# Altium PCB PCB1.PcbDoc
Units mil, origin at the board's own origin, x right, y up, seen from the top; angles counter-clockwise.
Board outline 3915 x 3915 mil, 2 copper layers (Top Layer, Bottom Layer); 27 components, 23 nets, 78 pads, 8 vias.
Unrouted connection lines stored in the file: 7.
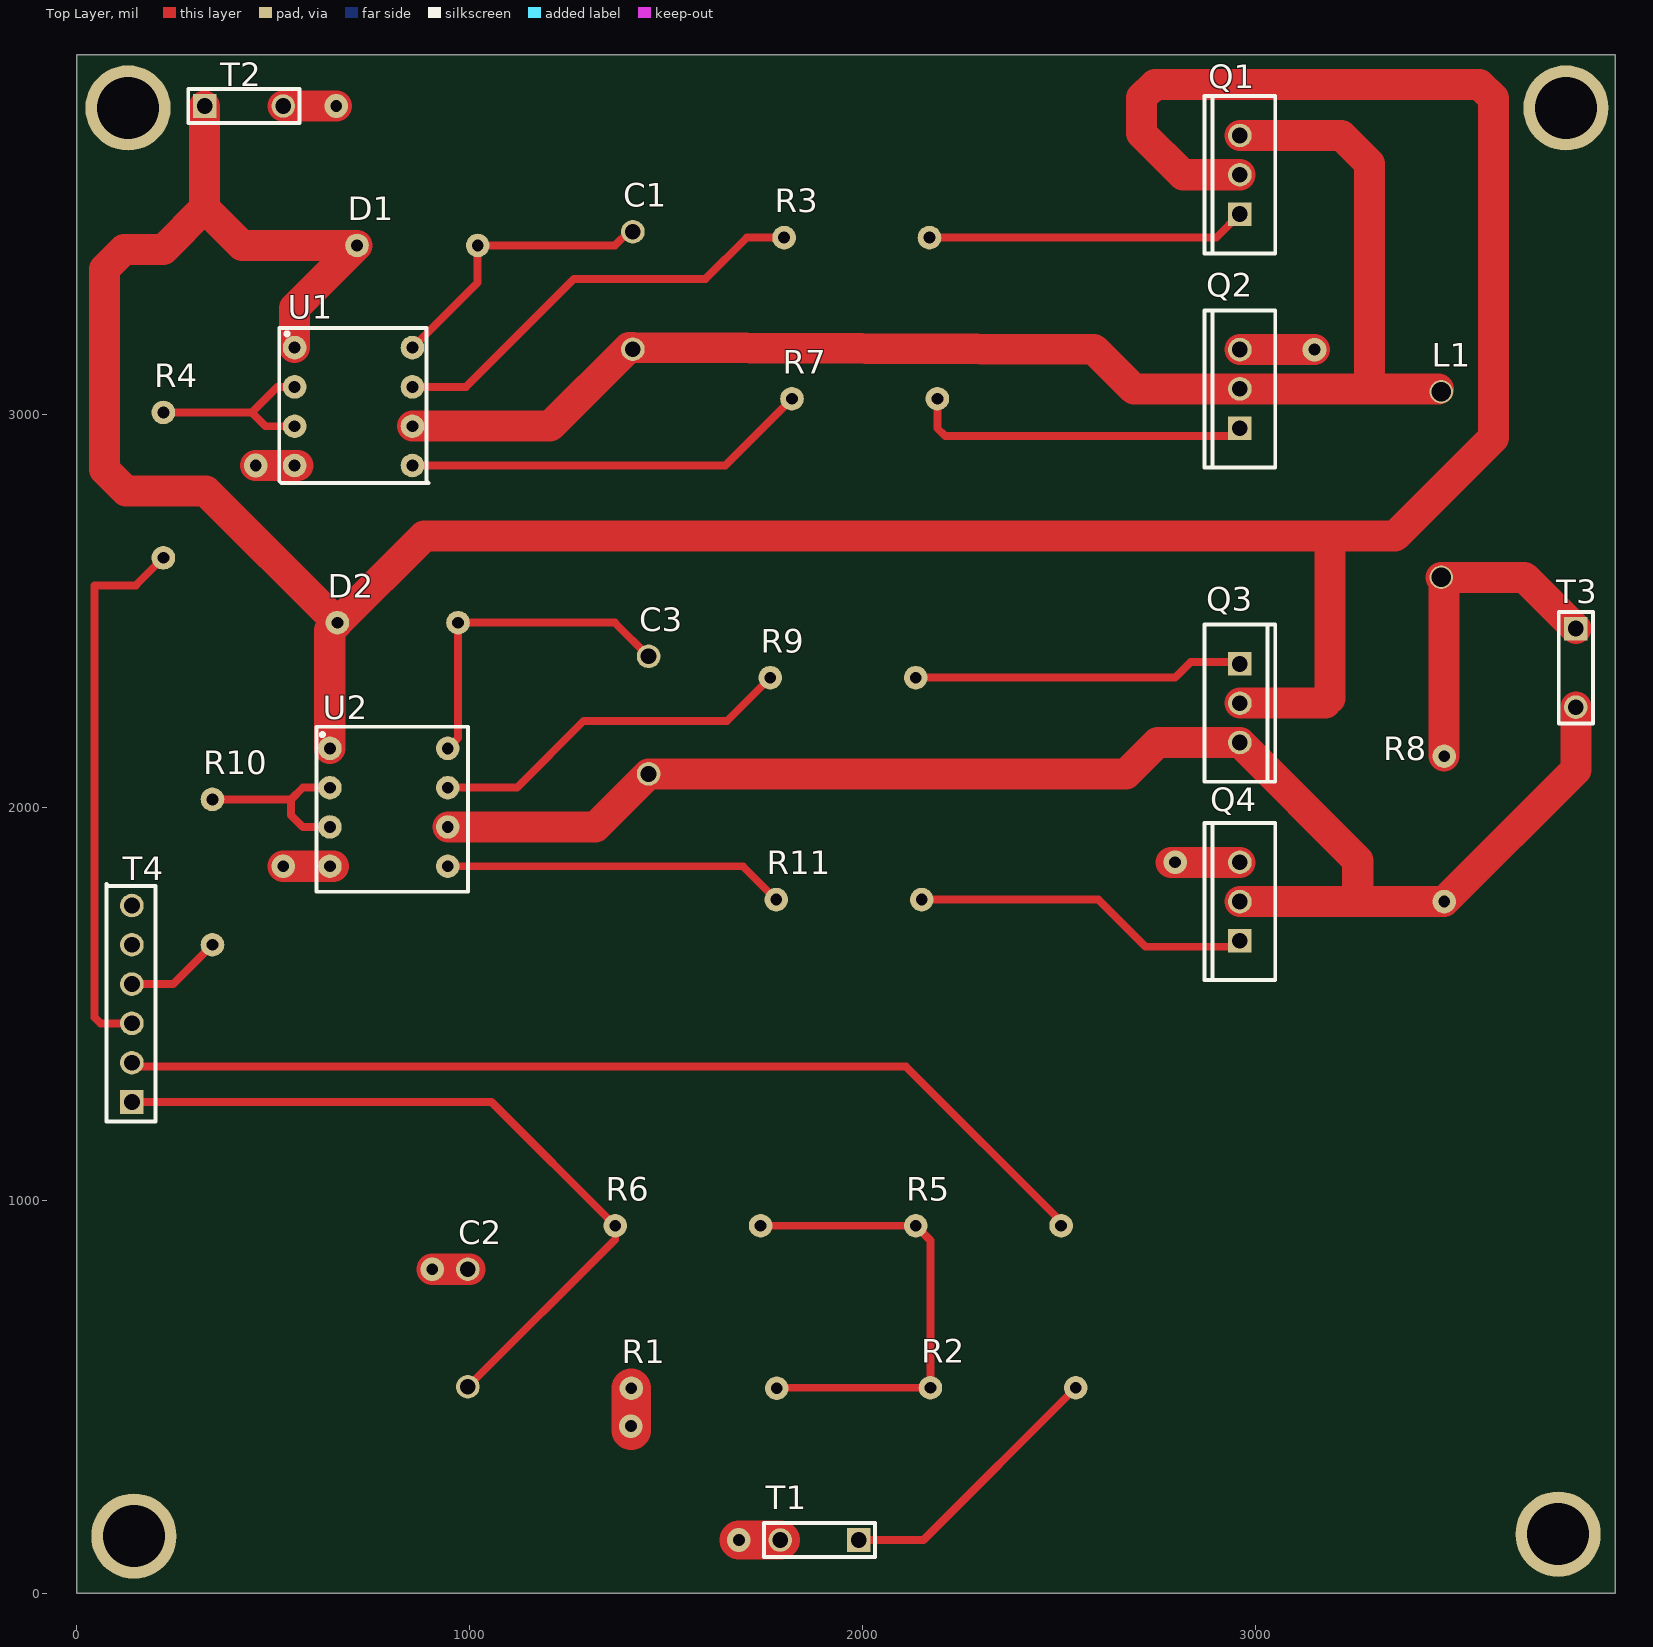
[diagram p0: Top Layer view]
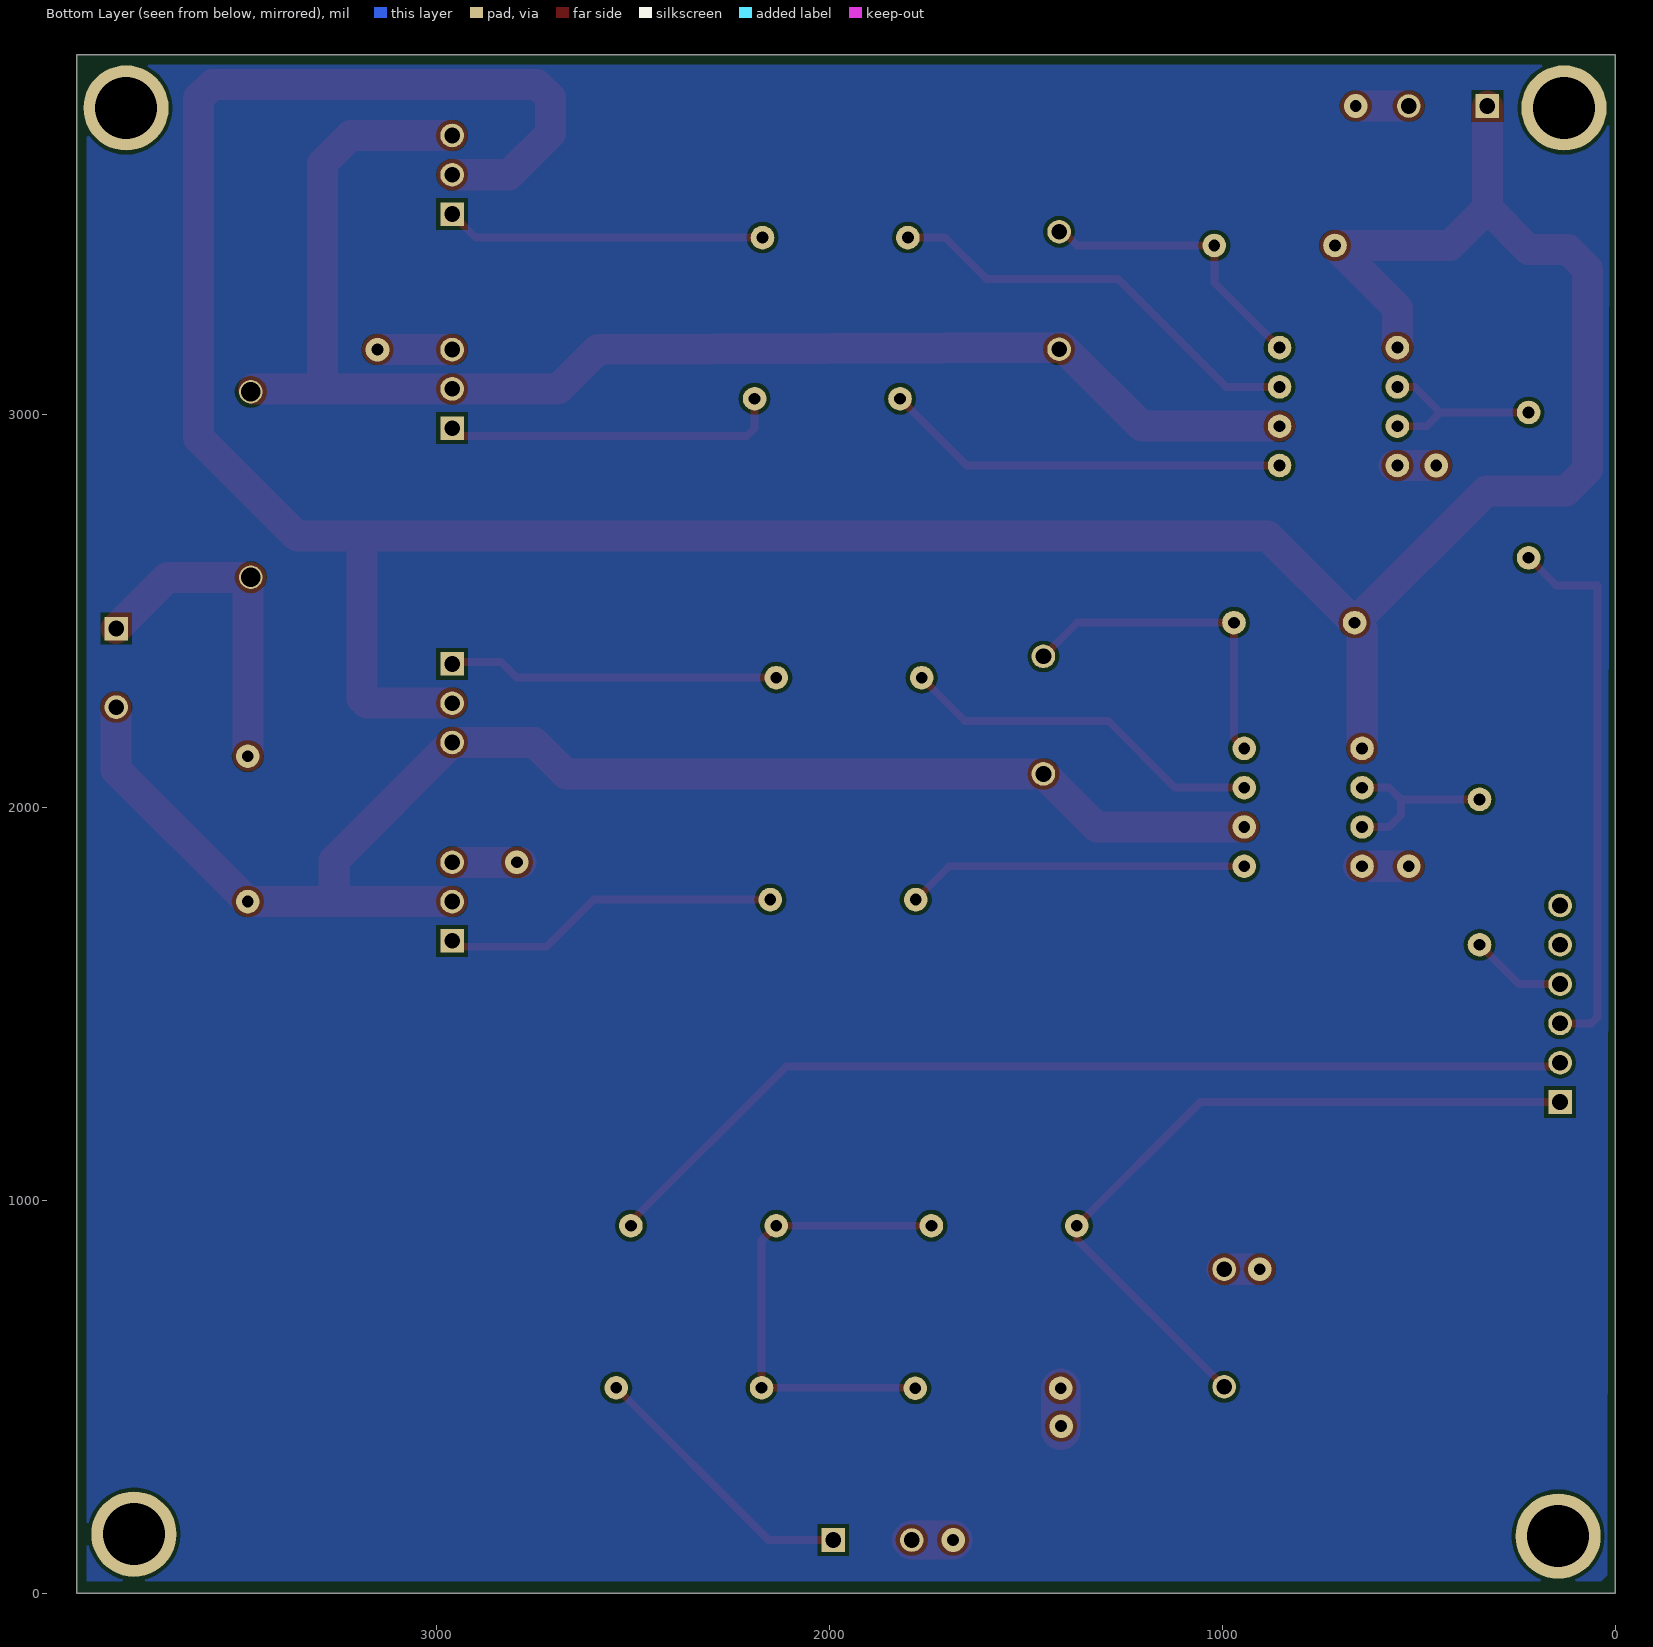
[diagram p1: Bottom Layer view, seen from below]

## Layer stack, top to bottom
Top Solder: solder mask 0.4, Solder Resist, Dk 3.5
Top Layer: signal copper 1.4
Dielectric 1: dielectric 12.6, FR-4, Dk 4.8
Bottom Layer: signal copper 1.4
Bottom Solder: solder mask 0.4, Solder Resist, Dk 3.5

## Board outline
0,0 3915,0 3915,3915 0,3915

## Design rules (kind name [scope] priority, off if disabled: settings)
Clearance [All] p1: gap=10 ignorepadtopadclearanceinfootprint=FALSE except(0: Arc-Hole Track-Hole SMDPad-Hole THPad-Hole Via-Hole Fill-Hole Poly-Hole Region-Hole Text-Hole)
PolygonConnect [All] p1: connectstyle=Relief reliefconductorwidth=10 reliefentries=4 polygonreliefangle="90 Angle" airgapwidth=10
RoutingVias [All] p1: holewidth=30 width=60 viastyle="Through Hole" minholewidth=30 minwidth=60 maxholewidth=30 maxwidth=60
SolderMaskExpansion [All] p1: expansion=4
Width [All] p1: maxlimit=100 minlimit=10 preferedwidth=20 minimp=50.000000 maximp=50.000000 favimp=50.000000
30 further rules are at their usual default settings.

## Components (designator, comment, footprint, x,y, rotation, side; value= is the part's Value field where it differs from the comment)
C1 "0.1uF" capacitor 1415,3315.39 r270 top
C2 "10nF" capacitor 995,674.61 r90 top
C3 "0.1uF" capacitor 1455,2234.61 r270 top
D1 "Diode" 1N4148TA 866.46,3430 r0 top
D2 "Diode" 1N4148TA 816.46,2470 r0 top
L1 "330uH" Inductor 3472.5,2821.5 r270 top
Q1 "IRF540" IRF540 2960,3610 r90 top
Q2 "IRF540" IRF540 2960,3065 r90 top
Q3 "IRF540" IRF540 2960,2265 r270 top
Q4 "IRF540" IRF540 2960,1760 r90 top
R1 "10k" Resistor 1596.21,521.25 r180 top
R2 "10k" Resistor 2357.46,522.5 r180 top
R3 "10" Resistor 1984.96,3450 r0 top
R4 "1k" Resistor 220,2819.96 r90 top
R5 "5k" Resistor 2320.04,935 r180 top
R6 "1k" Resistor 1555.04,935 r0 top
R7 "10" Resistor 2005.04,3040 r0 top
R8 "47" Resistor 3480,1945.04 r270 top
R9 "10" Resistor 1949.96,2330 r0 top
R10 "1k" Resistor 345,1835.04 r90 top
R11 "10" Resistor 1965.04,1765 r0 top
T1 "TERMINAL" "SOURCE TERMINAL" 1890,135 r180 top
T2 "TERMINAL" "SOURCE TERMINAL" 425,3785 r0 top
T3 "TERMINAL" "SOURCE TERMINAL" 3815,2355 r270 top
T4 "Arduino Terminal" "ARDUINO TERMINAL" 140,1500 r90 top
U1 "IR2103" IR2103 704,3020 r270 top
U2 "IR2103" IR2103 794,2000 r270 top

## Footprints (in the part's own frame and the unit in brackets; to place one, negate y for a bottom-side part, rotate by r counter-clockwise, add the part's x,y. Pads: shape width x height; smd on the part's side, far side on the other; paste and mask are expansions set on the pad)
1N4148TA [mil] "bootstrap for IR2103"
  round 60 hole 30: 1(-153.54,0) 2(153.54,0)
"ARDUINO TERMINAL" [mil]
  rect 60x60 hole 40: 1(-250,0)
  round 60 hole 40: 2(-150,0) 3(-50,0) 4(50,0) 5(150,0) 6(250,0)
capacitor [mil] "100 uF"
  round 60 hole 40: 1(-149.61,0) 2(149.61,0)
Inductor [mil]
  round 60 hole 50: 1(-236,0) 2(236,0)
IR2103 [mil] "to control 2 PWM output at the same time"
  round 60 hole 30: 1(-150,-150) 2(-50,-150) 3(50,-150) 4(150,-150) 5(150,150) 6(50,150) 7(-50,150) 8(-150,150)
  silkscreen extent -189,-173 -181,-165
IRF540 [mil] "100V Rds 0.077 Qgmax 72nC Qgs 11nC Qgd 32nC"
  rect 60x60 hole 40: 1(-100,0)
  round 60 hole 40: 2(0,0) 3(100,0)
  silkscreen extent -200,-90 200,90
Resistor [mil] "100 ohms, bigger resistor in the kit"
  round 60 hole 30: 1(-185.04,0) 2(185.04,0)
"SOURCE TERMINAL" [mil]
  rect 60x60 hole 40: 1(-100,0)
  round 60 hole 40: 2(100,0)
  silkscreen extent -142,-43 142,43

## Part data
C1 C2 C3: library part Capacitor
L1: library part Inductor
R1 R2 R3 R4 R5 R6 R7 R8 R9 R10 R11: library part "Resistor 0805"

## Free pads (board coordinates)
  round 217 hole 158: 2(130,3780) 3(3790,3780) 4(3770,150) 5(145,145)

## Via types
v1: diameter 60, hole 30, Top Layer to Bottom Layer, 8 vias

## Nets (pads, with @x,y where several pads share a name; then routed paths per layer and width w, separated by ;. In a path a pad name is that pad's centre, name@x,y a point inside that pad or via, vN(x,y) a via of type N, cw(c..) or ccw(c..) an arc to the next point about the centre after c; other vN are vias at no path point)
A0: C2.1 R6.1 T4.1 | length 1925.8
  Top Layer w20: T4.1 1055,1250 R6.1 1370,900 C2.1
D9: R4.1 T4.3 | length 1405.1
  Top Layer w20: T4.3 60,1450 45,1465 45,2564.92 150,2564.92 R4.1
D10: R10.1 T4.4 | length 246.4
  Top Layer w20: T4.4 245,1550 R10.1
GND: C2.2 Q2.3 Q4.3 R1.2 T1.2 T2.2 U1.4 U2.4 | length 1052
  Top Layer w10: U1.4@560,2867 U1.4@563,2870
  Top Layer w20: R1.2@1408.67,518.75 R1.2
  Top Layer w79: v1(455,2870) U1.4@563,2870 ; v1(525,1850) U2.4@653,1850 ; T2.2 v1(660,3785) ; v1(904.21,824.21) C2.2@1000,824.21 ; v1@2785,1860 Q4.3 ; Q2.3 v1(3150,3165)
  Top Layer w100: v1@1411.17,413.83 R1.2 ; v1(1685,135) T1.2
  other v1: 1410,425 2795,1860
NetC1_1: C1.1 D1.2 U1.8 | length 738.3
  Top Layer w20: U1.8 1020,3336 D1.2 1369.18,3430 1404.18,3465 C1.1
NetC1_2: C1.2 L1.1 Q1.3 Q2.2 U1.6 | length 3691.9
  Top Layer w20: 3260,3065 3290,3095 ; L1.1@3465,3065 L1.1
  Top Layer w79: U1.6 1204.21,2970 1405,3170.79 1415.02,3170.75 2589.21,3165.79 2690,3065 Q2.2 3260,3065 3268.28,3065 L1.1@3465,3065 ; Q1.3 3218.28,3710 3290,3638.28 3290,3095
NetC3_1: C3.1 D2.2 U2.8 | length 862.1
  Top Layer w20: U2.8@935,2150 U2.8@935,2160.82 ; U2.8 970,2176 D2.2 1369.21,2470 C3.1
NetC3_2: C3.2 Q3.3 Q4.2 R8.2 T3.2 U2.6 | length 3788.1
  Top Layer w79: U2.6 1320,1950 C3.2 2670,2085 2750,2165 Q3.3 3260,1865 3260,1760 ; Q4.2 3260,1760 ; T3.2 3815,2095 R8.2 3260,1760
NetL1_2: L1.2 R8.1 T3.1 | length 855.1
  Top Layer w20: L1.2 L1.2@3480,2578
  Top Layer w79: L1.2 3684.5,2585.5 T3.1 ; R8.1 L1.2@3480,2578
NetQ1_1: Q1.1 R3.2 | length 814.9
  Top Layer w20: R3.2 2900,3450 Q1.1
NetQ2_1: Q2.1 R7.2 | length 861.5
  Top Layer w20: R7.2 2190.08,2964.92 2210,2945 2940,2945 Q2.1
NetQ3_1: Q3.1 R9.2 | length 833.6
  Top Layer w20: R9.2@2145,2330 2795,2330 2835,2370 2955,2370 Q3.1
NetQ4_1: Q4.1 R11.2 | length 865.8
  Top Layer w20: R11.2 2600,1765 2720,1645 2945,1645 Q4.1
NetR1_1: R1.1 R2.2 R5.2 R6.2 | length 1221.7
  Top Layer w20: R6.2@1745.08,940 R6.2 R5.2 2172.42,897.58 R2.2 1782.5,522.5 R1.1
NetR2_1: R2.1 T1.1 | length 716.5
  Top Layer w20: T1.1 2155,135 R2.1 R2.1@2545,525
NetR3_1: R3.1 U1.7 | length 1103.3
  Top Layer w20: U1.7 990,3070 1265,3345 1600,3345 1705,3450 R3.1
NetR4_2: R4.2 U1.2 U1.3 | length 503.3
  Top Layer w10: U1.2@545,3070 U1.2 U1.2@563,3070
  Top Layer w20: R4.2 445,3005 ; U1.2@545,3070 510,3070 445,3005 ; U1.3 480,2970 445,3005 ; U1.2@556,3063 U1.2@563,3070
NetR7_1: R7.1 U1.5 | length 1036.4
  Top Layer w20: U1.5 1650,2870 R7.1
NetR9_1: R9.1 U2.7 | length 936.9
  Top Layer w20: U2.7 1120,2050 1290,2220 1654.92,2220 R9.1
NetR10_2: R10.2 U2.2 U2.3 | length 462.9
  Top Layer w20: R10.2 545.08,2020.08 ; U2.3 575,1950 545.08,1979.92 545.08,2020.08 ; U2.2 575,2050 545.08,2020.08
NetR11_1: R11.1 U2.5 | length 871.2
  Top Layer w20: U2.5 1695,1850 R11.1
P5V0: R5.1 T4.2 | length 2542.8
  Top Layer w20: T4.2 150,1340 2110,1340 2505.08,944.92 R5.1
VCC: D1.1 D2.1 Q1.2 Q3.2 T2.1 U1.1 U2.1 | length 8889.9
  Top Layer w20: U1.1@562.91,3170.09 U1.1@563,3170 ; U2.1@653,2150 U2.1@657.96,2154.96 ; 3178.28,2265 3190,2276.72
  Top Layer w79: T2.1 325,3525 ; U1.1 554,3271.09 D1.1 420,3430 325,3525 ; Q3.2 3178.28,2265 ; Q1.2 2815,3610 2710,3715 2710,3806.42 2743.58,3840 3570,3840 3605,3805 3605,2940 3355,2690 3190,2690 ; 3190,2276.72 3190,2690 ; 325,3525 220,3420 120,3420 70,3370 70,2860 125,2805 327.91,2805 D2.1 882.91,2690 3190,2690
  Top Layer w80: U2.1 644,2451.09 D2.1
pads on no net: T4.5 T4.6

## Polygon pours and split planes (outlines as drawn)
no net on Top Layer "Top Layer-No Net" (solid, pour order 2): 25,3925
no net on Top Layer "Top Layer-No Net 1" (solid, pour order 0): 1275,3655
no net on Bottom Layer (solid, pour order 24): 15,3890 3880,3890 3890,3880 3890,30 35,30 20,45
no net on Bottom Layer "Bottom Layer-No Net 4" (solid, pour order 16): -120,3540
no net on Bottom Layer "Bottom Layer-No Net 2" (solid, pour order 10): 30,3895
no net on Bottom Layer "Bottom Layer-No Net 3" (solid, pour order 8): 3520,1240
no net on Bottom Layer "Bottom Layer-No Net 1" (solid, pour order 4): 80,80

## Silkscreen, mask and mechanical layers (free items; w line width, h text height)
Top Overlay:
  lines w10: 75,1805 80,1800 ; 75,1805 80,1800 ; 75,1805 75,1200 200,1200 200,1800 80,1800 ; 515,2830 520,2825 895,2825 890,2830 890,3220 515,3220 515,2830 ; 610,1785 610,2205 995,2205 995,1785 610,1785